# Altium PCB bms_afe-1_1.PcbDoc (part 1 of 2)
Units mm, origin at the board's own origin, x right, y up, seen from the top; angles counter-clockwise.
Board outline 368 x 57.35 mm, 4 copper layers (L1, L2, L3, L4), stack 1.586 mm thick; 218 components, 120 nets, 515 pads, 192 vias.
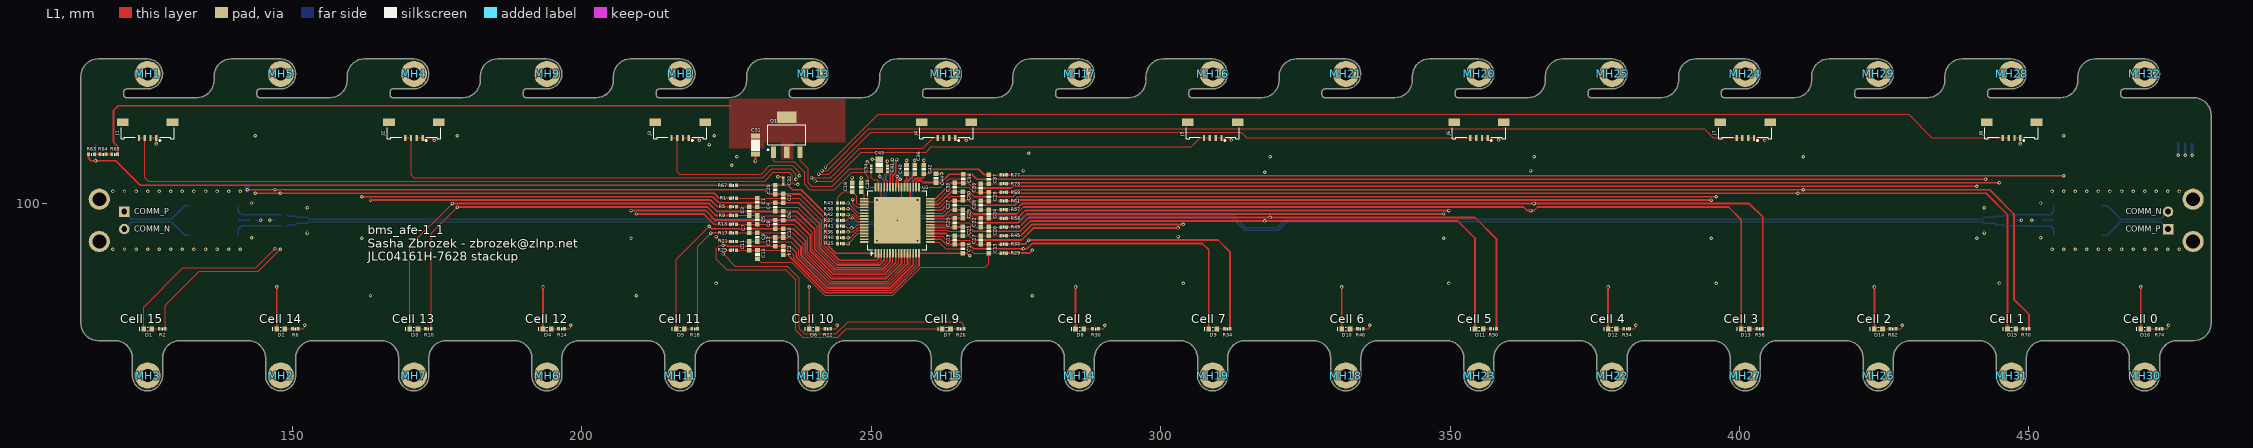
[diagram p0: L1 view]
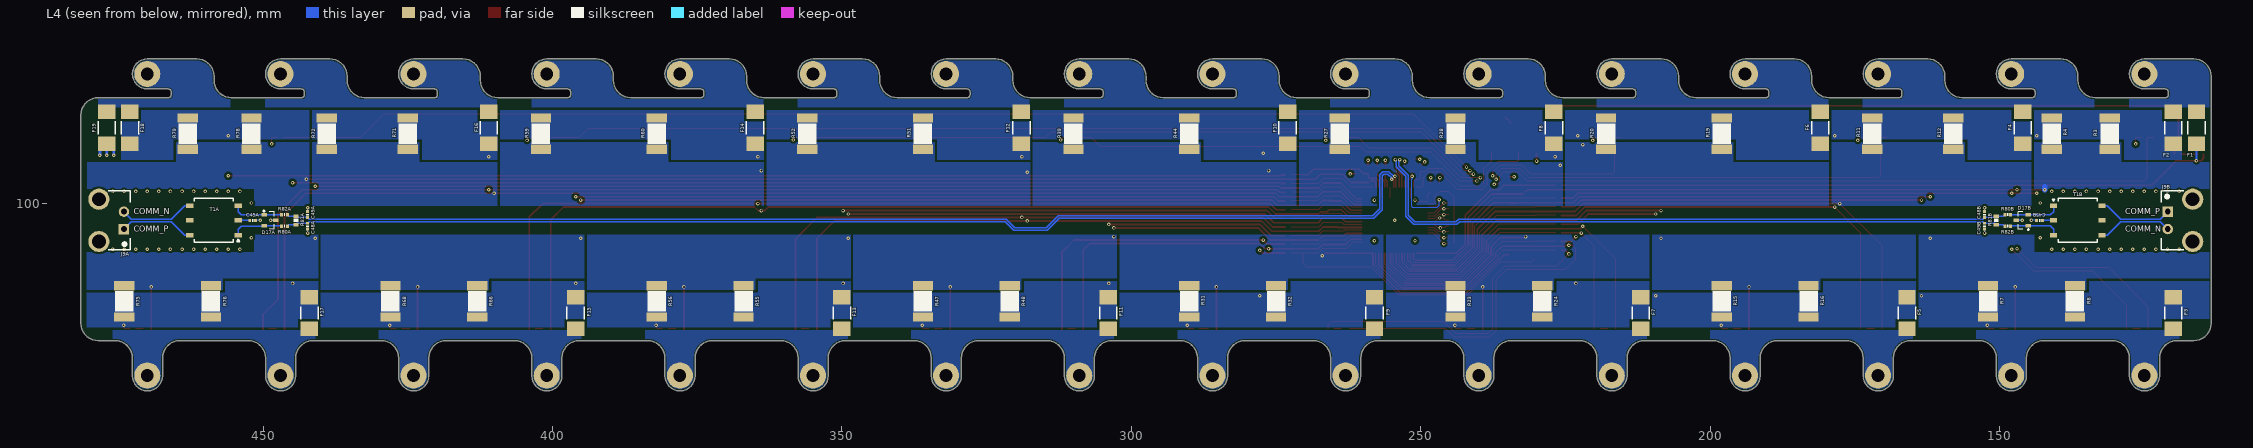
[diagram p1: L4 view, seen from below]
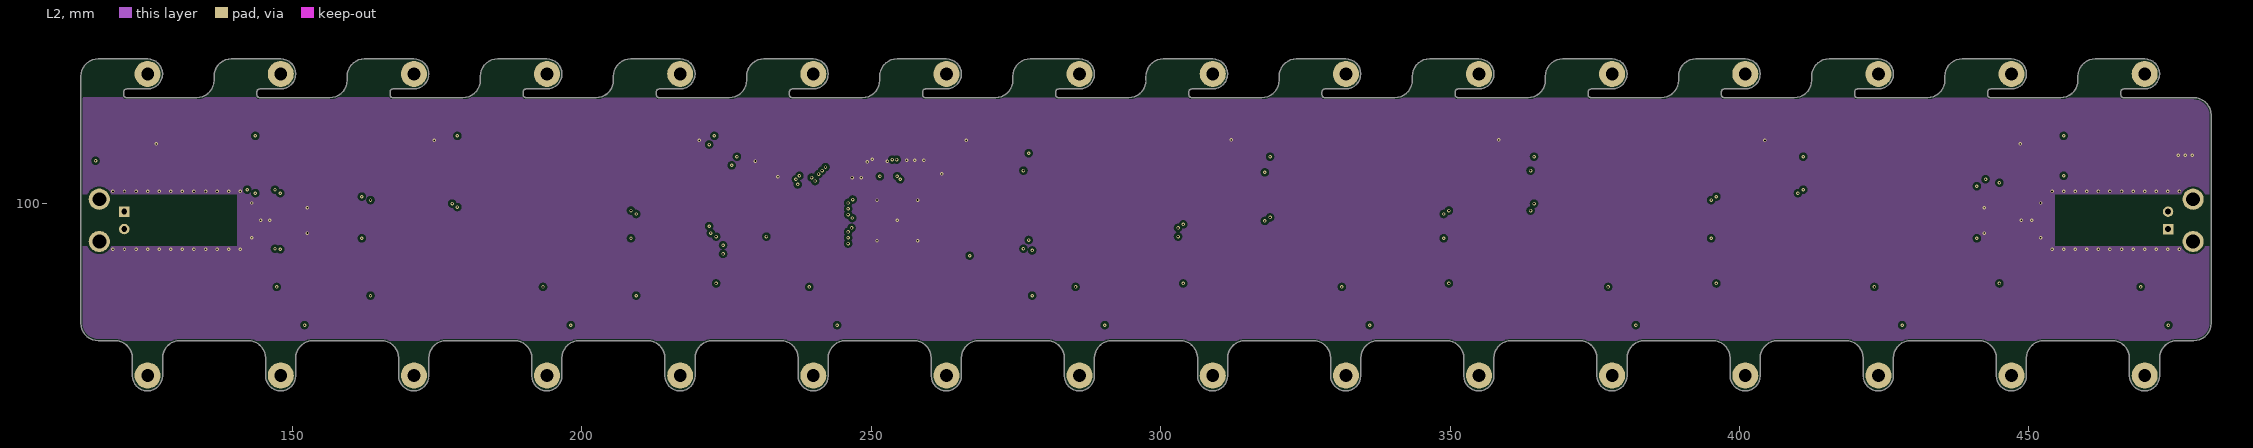
[diagram p2: L2]
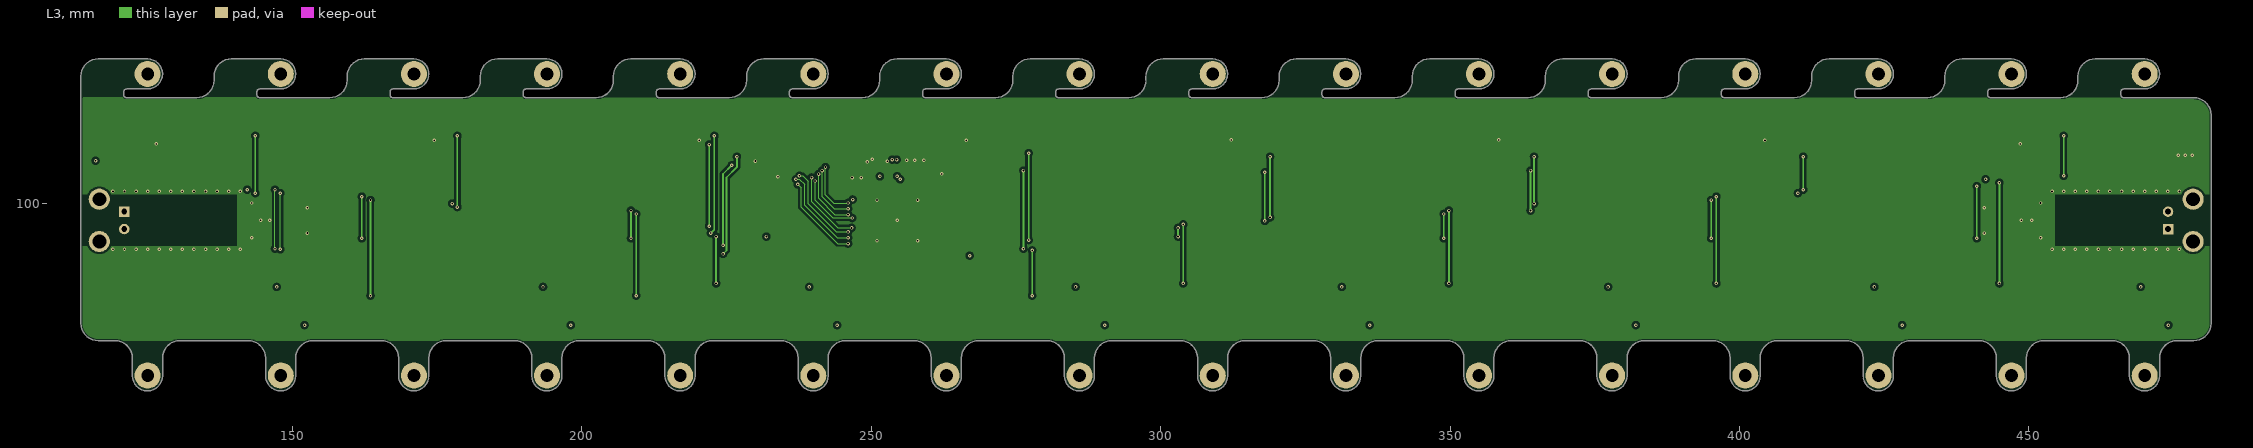
[diagram p3: L3]

## Layer stack, top to bottom
Top Solder: solder mask 0.0102, Solder Resist, Dk 3.5
L1: signal copper 0.035
D1: prepreg 0.2104, PP-006, Dk 4.1
L2: signal copper 0.0152
D2: dielectric 1.065, FR-4, Dk 4.8
L3: signal copper 0.0152
D3: prepreg 0.2104, PP-006, Dk 4.1
L4: signal copper 0.035
Bottom Solder: solder mask 0.0102, Solder Resist, Dk 3.5

## Board outline
1493 vertices, not listed, extent 113.469,67.545 481.469,124.895

## Design rules (kind name [scope] priority, off if disabled: settings)
AcuteAngle [All] p1: minimum=8.00000000000000E+0001 checktracksonly=FALSE
BoardOutlineClearance [All] p1: gap=0.3 ignorepadtopadclearanceinfootprint=FALSE except(0: Arc-SplitContinuation Track-SplitContinuation SMDPad-SplitContinuation THPad-SplitContinuation Via-SplitContinuation Fill-SplitContinuation Poly-SplitContinuation Region-SplitContinuation Text-SplitContinuation)
Clearance [All] p1: gap=0.15 ignorepadtopadclearanceinfootprint=FALSE except(0.4: Arc-Fill Arc-Poly Arc-Region Track-Fill Track-Poly Track-Region SMDPad-Fill SMDPad-Poly SMDPad-Region THPad-Fill THPad-Poly THPad-Region Via-Fill Via-Poly Via-Region Fill-Fill Fill-Poly Fill-Region Poly-Poly Poly-Region Region-Region)
DiffPairsRouting DE_100 [InDifferentialPairClass('DE_100')] p1: maxlimit=0.2 minlimit=0.2 mostfreqgap=0.2 toplayer_minwidth=0.218 toplayer_maxwidth=0.218 toplayer_prefwidth=0.218 midlayer1_minwidth=0.218 midlayer1_maxwidth=0.218 midlayer1_prefwidth=0.218 midlayer2_minwidth=0.218 midlayer2_maxwidth=0.218 midlayer2_prefwidth=0.218 bottomlayer_minwidth=0.218 bottomlayer_maxwidth=0.218 bottomlayer_prefwidth=0.218 maxuncoupledlength=12.7
HoleSize [All] p1: absolutevalues=TRUE maxlimit=64 minlimit=0.3 maxpercent=80.000 minpercent=20.000
MinimumAnnularRing [All] p1: minimumring=0.125
MinimumSolderMaskSliver [All] p1: minsoldermaskwidth=0.05
PlaneClearance [All] p1: clearance=0.4
PlaneConnect [All] p1: pad.planeconnectstyle=Relief pad.reliefexpansion=0.508 pad.reliefentries=4 pad.reliefconductorwidth=0.254 pad.reliefairgap=0.254 via.planeconnectstyle=Direct via.reliefexpansion=0.508 via.reliefentries=4 via.reliefconductorwidth=0.254 via.reliefairgap=0.254
PolygonConnect PolygonConnect_MH [HasFootprint('HOLE_M2')] p1: connectstyle=Direct reliefconductorwidth=0.254 reliefentries=4 polygonreliefangle="90 Angle" airgapwidth=0.254
PolygonConnect [All] p2: thpad.connectstyle=Relief thpad.reliefconductorwidth=0.254 thpad.reliefentries=4 thpad.polygonreliefangle="90 Angle" thpad.airgapwidth=0.254 smdpad.connectstyle=Direct smdpad.reliefconductorwidth=0.254 smdpad.reliefentries=4 smdpad.polygonreliefangle="90 Angle" smdpad.airgapwidth=0.254 via.connectstyle=Direct via.reliefconductorwidth=0.254 via.reliefentries=4 via.polygonreliefangle="90 Angle" via.airgapwidth=0.254
RoutingVias [All] p1: holewidth=0.3 width=0.6 viastyle="Through Hole" minholewidth=0.3 minwidth=0.6 maxholewidth=25 maxwidth=25 viatemplateguid#1={3B8295E5-CAAF-4C18-935D-10A9A8B2B12F} viatemplateguid#2={ACBB2F03-A6D7-4ED9-AAE5-3FD5D15C8CEC} viatemplatename#1=v50h35 viatemplatename#2=v65h30
SilkToSilkClearance [All] p1: silktosilkclearance=0.05
SilkToSolderMaskClearance [IsPad] p1: minsilkscreentomaskgap=0.005 clearancetoexposedcopper=FALSE
SolderMaskExpansion Vias [IsVia] p1: expansion=0.1 istentingtop=FALSE soldermaskfromhole=TRUE
SolderMaskExpansion [All] p2: expansion=0.102 istentingtop=FALSE
SupplyNets "Schematic Supply Nets_1" [InNet('GND')] p1: voltage=0.000
Width [All] p1: maxlimit=50 minlimit=0.15 preferedwidth=0.2
23 further rules are at their usual default settings.

## Classes and differential pairs
differential pair class DE_100: COMH. COML. COMMA COMMB
channel class comm_connector: conn_down conn_up
component class conn_up: C45B C48B C49B D17B J9B R80B R81B R82B T1B
component class conn_down: C45A C48A C49A D17A J9A R80A R81A R82A T1A
component class top: C1 C2 C3 C4 C5 C6 C7 C8 C9 C10 C11 C12 C13 C14 C15 C16 C17 C18 C19 C20 C21 C22 C23 C24 C25 C26 C27 C28 C29 C30 C31 C32 C33 C34 C35 C36 C37 C38 C39 C40 C41 C42 C43 C44 D1 D2 D3 D4 D5 D6 D7 D8 D9 D10 D11 D12 D13 D14 D15 D16 F1 F2 F3 F4 F5 F6 F7 F8 F9 F10 F11 F12 F13 F14 F15 F16 F17 F18 F19 J1 J2 J3 J4 J5 J6 J7 J8 MH1 MH2 MH3 MH4 MH5 MH6 MH7 MH8 MH9 MH10 MH11 MH12 MH13 MH14 MH15 MH16 MH17 MH18 MH19 MH20 MH21 MH22 MH23 MH24 MH25 MH26 MH27 MH28 MH29 MH30 MH31 MH32 Q1 R1 R2 R3 R4 R5 R6 R7 R8 R9 R10 R11 R12 R13 R14 R15 R16 R17 R18 R19 R20 R21 R22 R23 R24 R25 R26 R27 R28 R29 R30 R31 R32 R33 R34 R35 R36 R37 R38 R39 R40 R41 R42 R43 R44 R45 R46 R47 R48 R49 R50 R51 R52 R53 R54 R55 R56 R57 R58 R59 R60 R61 R62 R63 R64 R65 R66 R67 R68 R69 R70 R71 R72 R73 R74 R75 R76 R77 R78 R79 U1
differential pair COMMB: +COMMB_P -COMMB_N
differential pair COMMA: +COMMA_P -COMMA_N
differential pair COML.: +COML._P -COML._N
differential pair COMH.: +COMH._P -COMH._N

## Components (designator, comment, footprint, x,y, rotation, side; value= is the part's Value field where it differs from the comment)
C1 "CL10B474KA8NNNC" C0603 230.3,100.1 r270 top
C2 "CL10B474KA8NNNC" C0603 234.8,100.8 r270 top
C3 "CL10B474KA8NNNC" C0603 228.9,98.6 r270 top
C4 "CL10B474KA8NNNC" C0603 233.4,99.3 r270 top
C5 "CL10B474KA8NNNC" C0603 230.3,97.1 r270 top
C6 "CL10B474KA8NNNC" C0603 234.8,97.8 r270 top
C7 "CL10B474KA8NNNC" C0603 228.9,95.6 r270 top
C8 "CL10B474KA8NNNC" C0603 233.4,96.3 r270 top
C9 "CL10B474KA8NNNC" C0603 230.3,94.1 r270 top
C10 "CL10B474KA8NNNC" C0603 234.8,94.8 r270 top
C11 "CL10B474KA8NNNC" C0603 228.9,92.6 r270 top
C12 "CL10B474KA8NNNC" C0603 233.4,93.3 r270 top
C13 "CL10B474KA8NNNC" C0603 230.35,91.1 r270 top
C14 "CL10B474KA8NNNC" C0603 234.8,91.8 r270 top
C15 "CL10B474KA8NNNC" C0603 270.3,92.1 r90 top
C16 "CL10B474KA8NNNC" C0603 265.8,92.1 r90 top
C17 "CL10B474KA8NNNC" C0603 268.9,93.6 r90 top
C18 "CL10B105KA8NNNC" C0603 246.7,102.7 r90 top
C19 "CL10B474KA8NNNC" C0603 264.4,93.6 r90 top
C20 "CL10B474KA8NNNC" C0603 270.3,95.1 r90 top
C21 "CL10B474KA8NNNC" C0603 265.8,95.1 r90 top
C22 "CL10B474KA8NNNC" C0603 268.9,96.6 r90 top
C23 "CL10B474KA8NNNC" C0603 264.4,96.6 r90 top
C24 "CL10B474KA8NNNC" C0603 270.3,98.1 r90 top
C25 "CL10B474KA8NNNC" C0603 265.8,98.1 r90 top
C26 "CL10B474KA8NNNC" C0603 268.9,99.6 r90 top
C27 "CL10B474KA8NNNC" C0603 264.4,99.6 r90 top
C28 "CL10B474KA8NNNC" C0603 270.3,101.1 r90 top
C29 "CL10B474KA8NNNC" C0603 233.4,102.3 r90 top
C30 "CL10B474KA8NNNC" C0603 265.8,101.2 r90 top
C31 "TCC1206X7R224K101FT" C1206 230,110 r270 top
C32 "CC0402KRX7R0BB103" C0402 234.8,103.8 r90 top
C33 "CL10B474KA8NNNC" C0603 268.9,102.6 r90 top
C34 "CL05B104KB54PNC" C0402 250,105.9 r90 top
C35 "CL10B474KA8NNNC" C0603 264.4,102.7 r90 top
C36 "CL10B105KA8NNNC" C0603 257.5,105.8 r90 top
C37 "CL10B474KA8NNNC" C0603 270.3,104.1 r90 top
C38 "CL10B474KA8NNNC" C0603 265.9,104.2 r90 top
C39 "CL10B105KA8NNNC" C0603 248.3,102.7 r90 top
C40 "CL10B105KA8NNNC" C0603 256.1,105.8 r90 top
C41 "CL05B104KB54PNC" C0402 252.8,105.9 r90 top
C42 "CL10B474KA8NNNC" C0603 259.1,105.8 r90 top
C43 "CL21B475KOFNNNE" C0805 251.4,106.6 r90 top
C44 "CL10B474KA8NNNC" C0603 261.2,104.3 r90 top
C45A "CL05B104KB54PNC" C0402 451.8,97 r180 bottom (schematic designator C45)
C45B "CL05B104KB54PNC" C0402 143.1,97 r0 bottom (schematic designator C45)
C48A "0402YA101JAT2A" C0402 442.3,96 r270 bottom (schematic designator C48)
C48B "0402YA101JAT2A" C0402 152.6,98 r90 bottom (schematic designator C48)
C49A "0402YA101JAT2A" C0402 442.3,98 r90 bottom (schematic designator C49)
C49B "0402YA101JAT2A" C0402 152.6,96 r270 bottom (schematic designator C49)
D1 "LTST-C190KRKT" LED_0603P_RED 125,78.25 r0 top
D2 "LTST-C190KRKT" LED_0603P_RED 148,78.25 r0 top
D3 "LTST-C190KRKT" LED_0603P_RED 171,78.25 r0 top
D4 "LTST-C190KRKT" LED_0603P_RED 194,78.25 r0 top
D5 "LTST-C190KRKT" LED_0603P_RED 217,78.25 r0 top
D6 "LTST-C190KRKT" LED_0603P_RED 240,78.25 r0 top
D7 "LTST-C190KRKT" LED_0603P_RED 263,78.25 r0 top
D8 "LTST-C190KRKT" LED_0603P_RED 286,78.25 r0 top
D9 "LTST-C190KRKT" LED_0603P_RED 309,78.25 r0 top
D10 "LTST-C190KRKT" LED_0603P_RED 332,78.25 r0 top
D11 "LTST-C190KRKT" LED_0603P_RED 355,78.25 r0 top
D12 "LTST-C190KRKT" LED_0603P_RED 378,78.25 r0 top
D13 "LTST-C190KRKT" LED_0603P_RED 401,78.25 r0 top
D14 "LTST-C190KRKT" LED_0603P_RED 424,78.25 r0 top
D15 "LTST-C190KRKT" LED_0603P_RED 447,78.25 r0 top
D16 "LTST-C190KRKT" LED_0603P_RED 470,78.25 r0 top
D17A "PESD2USB3UX" 3SOT23 448.8,97 r180 bottom (schematic designator D17)
D17B "PESD2USB3UX" 3SOT23 146.1,97 r0 bottom (schematic designator D17)
F1 "JFC2410-0500TS" JDTFUSE_JFC2410 116,113 r270 bottom
F2 "JFC2410-0500TS" JDTFUSE_JFC2410 120,113 r270 bottom
F3 "JFC2410-0500TS" JDTFUSE_JFC2410 120,81 r90 bottom
F4 "JFC2410-0500TS" JDTFUSE_JFC2410 146,113 r270 bottom
F5 "JFC2410-0500TS" JDTFUSE_JFC2410 166,81 r90 bottom
F6 "JFC2410-0500TS" JDTFUSE_JFC2410 181,113 r270 bottom
F7 "JFC2410-0500TS" JDTFUSE_JFC2410 212,81 r90 bottom
F8 "JFC2410-0500TS" JDTFUSE_JFC2410 227,113 r270 bottom
F9 "JFC2410-0500TS" JDTFUSE_JFC2410 258,81 r90 bottom
F10 "JFC2410-0500TS" JDTFUSE_JFC2410 273,113 r270 bottom
F11 "JFC2410-0500TS" JDTFUSE_JFC2410 304,81 r90 bottom
F12 "JFC2410-0500TS" JDTFUSE_JFC2410 319,113 r270 bottom
F13 "JFC2410-0500TS" JDTFUSE_JFC2410 350,81 r90 bottom
F14 "JFC2410-0500TS" JDTFUSE_JFC2410 365,113 r270 bottom
F15 "JFC2410-0500TS" JDTFUSE_JFC2410 396,81 r90 bottom
F16 "JFC2410-0500TS" JDTFUSE_JFC2410 411,113 r270 bottom
F17 "JFC2410-0500TS" JDTFUSE_JFC2410 442,81 r90 bottom
F18 "JFC2410-0500TS" JDTFUSE_JFC2410 473,113 r270 bottom
F19 "JFC2410-0500TS" JDTFUSE_JFC2410 477,113 r270 bottom
J1 "2005280040" MOLEX_FD19_1.00mm_2005280040 125,114.6 r180 top
J2 "2005280040" MOLEX_FD19_1.00mm_2005280040 171,114.6 r180 top
J3 "2005280040" MOLEX_FD19_1.00mm_2005280040 217,114.6 r180 top
J4 "2005280040" MOLEX_FD19_1.00mm_2005280040 263,114.6 r180 top
J5 "2005280040" MOLEX_FD19_1.00mm_2005280040 309,114.6 r180 top
J6 "2005280040" MOLEX_FD19_1.00mm_2005280040 355,114.6 r180 top
J7 "2005280040" MOLEX_FD19_1.00mm_2005280040 401,114.6 r180 top
J8 "2005280040" MOLEX_FD19_1.00mm_2005280040 447,114.6 r180 top
J9A "43650-0204" MOLEX_MICROFIT_0436500204 478,97 r270 bottom locked (schematic designator J9)
J9B "43650-0204" MOLEX_MICROFIT_0436500204 117,97 r90 bottom locked (schematic designator J9)
MH1 "HOLE_M2" HOLE_M2 125,122.3 r0 top
MH2 "HOLE_M2" HOLE_M2 148,70.2 r0 top
MH3 "HOLE_M2" HOLE_M2 125,70.2 r0 top
MH4 "HOLE_M2" HOLE_M2 171,122.3 r0 top
MH5 "HOLE_M2" HOLE_M2 148,122.3 r0 top
MH6 "HOLE_M2" HOLE_M2 194,70.2 r0 top
MH7 "HOLE_M2" HOLE_M2 171,70.2 r0 top
MH8 "HOLE_M2" HOLE_M2 217,122.3 r0 top
MH9 "HOLE_M2" HOLE_M2 194,122.3 r0 top
MH10 "HOLE_M2" HOLE_M2 240,70.2 r0 top
MH11 "HOLE_M2" HOLE_M2 217,70.2 r0 top
MH12 "HOLE_M2" HOLE_M2 263,122.3 r0 top
MH13 "HOLE_M2" HOLE_M2 240,122.3 r0 top
MH14 "HOLE_M2" HOLE_M2 286,70.2 r0 top
MH15 "HOLE_M2" HOLE_M2 263,70.2 r0 top
MH16 "HOLE_M2" HOLE_M2 309,122.3 r0 top
MH17 "HOLE_M2" HOLE_M2 286,122.3 r0 top
MH18 "HOLE_M2" HOLE_M2 332,70.2 r0 top
MH19 "HOLE_M2" HOLE_M2 309,70.2 r0 top
MH20 "HOLE_M2" HOLE_M2 355,122.3 r0 top
MH21 "HOLE_M2" HOLE_M2 332,122.3 r0 top
MH22 "HOLE_M2" HOLE_M2 378,70.2 r0 top
MH23 "HOLE_M2" HOLE_M2 355,70.2 r0 top
MH24 "HOLE_M2" HOLE_M2 401,122.3 r0 top
MH25 "HOLE_M2" HOLE_M2 378,122.3 r0 top
MH26 "HOLE_M2" HOLE_M2 424,70.2 r0 top
MH27 "HOLE_M2" HOLE_M2 401,70.2 r0 top
MH28 "HOLE_M2" HOLE_M2 447,122.3 r0 top
MH29 "HOLE_M2" HOLE_M2 424,122.3 r0 top
MH30 "HOLE_M2" HOLE_M2 470,70.2 r0 top
MH31 "HOLE_M2" HOLE_M2 447,70.2 r0 top
MH32 "HOLE_M2" HOLE_M2 470,122.3 r0 top
Q1 "NSV1C201MZ4T1G" 4SOT223 235.4,111.8 r0 top
R1 "RC0402FR-07100RL" R0402 226.2,100.85 r0 top value=100
R2 "0402WGF1001TCE" R0402 127.5,78.25 r180 top value=1k
R3 "RC2512FK-0730RL" R2512 131,112 r90 bottom value=30
R4 "RC2512FK-0730RL" R2512 141,112 r270 bottom value=30
R5 "RC0402FR-07100RL" R0402 226.2,99.35 r0 top value=100
R6 "0402WGF1001TCE" R0402 150.5,78.25 r180 top value=1k
R7 "RC2512FK-0730RL" R2512 152,83 r270 bottom value=30
R8 "RC2512FK-0730RL" R2512 137,83 r90 bottom value=30
R9 "RC0402FR-07100RL" R0402 226.2,97.85 r0 top value=100
R10 "0402WGF1001TCE" R0402 173.5,78.25 r180 top value=1k
R11 "RC2512FK-0730RL" R2512 172,112 r90 bottom value=30
R12 "RC2512FK-0730RL" R2512 158,112 r270 bottom value=30
R13 "RC0402FR-07100RL" R0402 226.2,96.35 r0 top value=100
R14 "0402WGF1001TCE" R0402 196.5,78.25 r180 top value=1k
R15 "RC2512FK-0730RL" R2512 198,83 r270 bottom value=30
R16 "RC2512FK-0730RL" R2512 183,83 r90 bottom value=30
R17 "RC0402FR-07100RL" R0402 226.2,94.85 r0 top value=100
R18 "0402WGF1001TCE" R0402 219.5,78.25 r180 top value=1k
R19 "RC2512FK-0730RL" R2512 198,112 r90 bottom value=30
R20 "RC2512FK-0730RL" R2512 218,112 r270 bottom value=30
R21 "RC0402FR-07100RL" R0402 226.2,93.35 r0 top value=100
R22 "0402WGF1001TCE" R0402 242.5,78.25 r180 top value=1k
R23 "RC2512FK-0730RL" R2512 244,83 r270 bottom value=30
R24 "RC2512FK-0730RL" R2512 229,83 r90 bottom value=30
R25 "RC0402FR-07100RL" R0402 226.2,91.85 r0 top value=100
R26 "0402WGF1001TCE" R0402 265.5,78.25 r180 top value=1k
R27 "RC2512FK-0730RL" R2512 264,112 r90 bottom value=30
R28 "RC2512FK-0730RL" R2512 244,112 r270 bottom value=30
R29 "RC0402FR-07100RL" R0402 272.9,91.35 r180 top value=100
R30 "0402WGF1001TCE" R0402 288.75,78.25 r180 top value=1k
R31 "RC2512FK-0730RL" R2512 290,83 r270 bottom value=30
R32 "RC2512FK-0730RL" R2512 275,83 r90 bottom value=30
R33 "RC0402FR-07100RL" R0402 272.9,92.9 r180 top value=100
R34 "0402WGF1001TCE" R0402 311.5,78.25 r180 top value=1k
R35 "0402WGF1002TCE" R0402 244.7,93 r0 top value=10k
R36 "0402WGF1002TCE" R0402 244.7,95 r0 top value=10k
R37 "0402WGF1002TCE" R0402 244.7,97 r0 top value=10k
R38 "0402WGF1002TCE" R0402 244.7,99 r0 top value=10k
R39 "RC2512FK-0730RL" R2512 310,112 r90 bottom value=30
R40 "0402WGF1002TCE" R0402 244.7,94 r0 top value=10k
R41 "0402WGF1002TCE" R0402 244.7,96 r0 top value=10k
R42 "0402WGF1002TCE" R0402 244.7,98 r0 top value=10k
R43 "0402WGF1002TCE" R0402 244.7,100 r0 top value=10k
R44 "RC2512FK-0730RL" R2512 290,112 r270 bottom value=30
R45 "RC0402FR-07100RL" R0402 272.9,94.35 r180 top value=100
R46 "0402WGF1001TCE" R0402 334.5,78.25 r180 top value=1k
R47 "RC2512FK-0730RL" R2512 336,83 r270 bottom value=30
R48 "RC2512FK-0730RL" R2512 321,83 r90 bottom value=30
R49 "RC0402FR-07100RL" R0402 272.9,95.85 r180 top value=100
R50 "0402WGF1001TCE" R0402 357.5,78.25 r180 top value=1k
R51 "RC2512FK-0730RL" R2512 336,112 r90 bottom value=30
R52 "RC2512FK-0730RL" R2512 356,112 r270 bottom value=30
R53 "RC0402FR-07100RL" R0402 272.9,97.35 r180 top value=100
R54 "0402WGF1001TCE" R0402 380.5,78.25 r180 top value=1k
R55 "RC2512FK-0730RL" R2512 367,83 r270 bottom value=30
R56 "RC2512FK-0730RL" R2512 382,83 r90 bottom value=30
R57 "RC0402FR-07100RL" R0402 272.9,98.85 r180 top value=100
R58 "0402WGF1001TCE" R0402 403.5,78.25 r180 top value=1k
R59 "RC2512FK-0730RL" R2512 402,112 r90 bottom value=30
R60 "RC2512FK-0730RL" R2512 382,112 r270 bottom value=30
R61 "RC0402FR-07100RL" R0402 272.9,100.35 r180 top value=100
R62 "0402WGF1001TCE" R0402 426.5,78.25 r180 top value=1k
R63 "RC0402FR-07100RL" R0402 115.3,108.4 r180 top value=100
R64 "RC0402FR-07100RL" R0402 117.3,108.4 r180 top value=100
R65 "RC0402FR-07100RL" R0402 119.3,108.4 r180 top value=100
R66 "RC2512FK-0730RL" R2512 413,83 r270 bottom value=30
R67 "RC0402FR-0730RL" R0402 226.2,103.05 r0 top value=30
R68 "RC2512FK-0730RL" R2512 428,83 r90 bottom value=30
R69 "RC0402FR-07100RL" R0402 272.9,101.85 r180 top value=100
R70 "0402WGF1001TCE" R0402 449.5,78.25 r180 top value=1k
R71 "RC2512FK-0730RL" R2512 425,112 r90 bottom value=30
R72 "RC2512FK-0730RL" R2512 439,112 r270 bottom value=30
R73 "RC0402FR-07100RL" R0402 272.9,103.35 r180 top value=100
R74 "0402WGF1001TCE" R0402 472.5,78.25 r180 top value=1k
R75 "RC2512FK-0730RL" R2512 474,83 r270 bottom value=30
R76 "RC2512FK-0730RL" R2512 459,83 r90 bottom value=30
R77 "RC0402FR-07100RL" R0402 272.9,104.85 r180 top value=100
R78 "RC2512FK-0730RL" R2512 452,112 r90 bottom value=30
R79 "RC2512FK-0730RL" R2512 463,112 r270 bottom value=30
R80A "0402WGF499JTCE" R0402 446.3,96 r0 bottom value=49.9 (schematic designator R80)
R80B "0402WGF499JTCE" R0402 148.6,98 r180 bottom value=49.9 (schematic designator R80)
R81A "HP03W5F1001T5E" R0603 444.3,97 r270 bottom value=1k (schematic designator R81)
R81B "HP03W5F1001T5E" R0603 150.6,97 r90 bottom value=1k (schematic designator R81)
R82A "0402WGF499JTCE" R0402 446.3,98 r0 bottom value=49.9 (schematic designator R82)
R82B "0402WGF499JTCE" R0402 148.6,96 r180 bottom value=49.9 (schematic designator R82)
T1A "SM91502ALA-E" BOURNS_SM91502 458.5,97 r0 bottom (schematic designator T1)
T1B "SM91502ALA-E" BOURNS_SM91502 136.5,97 r180 bottom (schematic designator T1)
U1 "BQ79616PAPRQ1" TI_PAP0064F 254.5,97 r90 top

## Footprints (in the part's own frame and the unit in brackets; to place one, negate y for a bottom-side part, rotate by r counter-clockwise, add the part's x,y. Pads: shape width x height; smd on the part's side, far side on the other; paste and mask are expansions set on the pad)
3SOT23 [mm] "SOT23, 3-Leads, Body 3.0x2.6mm (max), Pitch 1.01mm, IPC High Density"
  rect 0.95x0.6 smd: 1(-1.025,0.95) 2(-1.025,-0.95) 3(1.025,0)
  silkscreen extent -1.18,-1.5 0.7,1.73, body extent -1.25,-1.5 1.25,1.5, height 1.01
4SOT223 [mm] "SOT223, 4-Leads, Body 6.6x7.1mm (max), Pitch 2.30mm, IPC Medium Density"
  rect 0.9x2 smd: 1(-2.3,-3) 2(0,-3) 3(2.3,-3)
  rect 3.3x2 smd: 4(0,3)
  silkscreen extent -3.32,-2.72 3.3,1.7, body extent -3.25,-3.5 3.25,3.5, height 1.76
BOURNS_SM91502 [mil]
  rect 50x30 smd mask+4: 1(-165,100) 2(-165,0) 3(-165,-100) 4(165,-100) 5(165,0) 6(165,100)
  silkscreen extent -175,-150 132,150, body extent -132,-150 132,150, height 225
C0402 [mm]
  rect 0.5x0.5 smd: 1(-0.5,0) 2(0.5,0)
  silkscreen extent -0.13,-0.25 0.13,0.25, body extent -0.5,-0.25 0.5,0.25, height 0.6
C0603 [mm]
  rect 0.8x0.8 smd: 1(-0.75,0) 2(0.75,0)
  silkscreen extent -0.23,-0.4 0.23,0.4, body extent -0.8,-0.4 0.8,0.4, height 1
C0805 [mm]
  rect 0.9x1.3 smd: 1(-0.95,0) 2(0.95,0)
  silkscreen extent -0.38,-0.63 0.37,0.63, body extent -1,-0.63 1,0.63, height 1.45
C1206 [mm]
  rect 0.9x1.6 smd: 1(-1.55,0) 2(1.55,0)
  silkscreen extent -0.97,-0.8 0.97,0.8, body extent -1.6,-0.8 1.6,0.8, height 1.9
HOLE_M2 [mm]
  round 4.5 hole 2.2 mask+0.102: 1(0,0)
JDTFUSE_JFC2410 [mm] "JFC2410-0500TS 6.1 x 2.5 mm Fuse smd 2410"
  rect 2.5x3 smd: 1(-2.75,0) 2(2.75,0)
  silkscreen extent -1.1,-1.5 1.1,1.5, body extent -3.05,-1.25 3.05,1.25, height 2.5
LED_0603P_RED [mm]
  rect 0.8x0.85 smd: 1(0.7,0) 2(-0.7,0)
  silkscreen extent -1.4,-0.33 0.1,0.33, body extent -0.81,-0.4 0.81,0.4, height 0.6
MOLEX_FD19_1.00mm_2005280040 [mm]
  rect 0.4x1 smd: 1(-1.5,3.35) 2(-0.5,3.35) 3(0.5,3.35) 4(1.5,3.35)
  rect 2x1.3 smd: EP0(-4.3,0.65) EP1(4.3,0.65)
  silkscreen extent -4.6,1.6 4.6,3.92, body extent -5,-1.75 5,3.55, height 1.91
MOLEX_MICROFIT_0436500204 [mm]
  rect 1.8x1.8 hole 1.02 paste-2539.97 mask+0: 1(1.5,3.965)
  round 1.8 hole 1.02 paste-2539.97 mask+0: 2(-1.5,3.965)
  round 3.66 hole 2.41 paste-2539.97 mask+0: 3(3.65,-0.355) 4(-3.65,-0.355)
  silkscreen extent -5.1,1.22 5.1,5.08, body extent -4.82,-4.95 4.83,4.95, height 6.07
R0402 [mm]
  rect 0.5x0.6 smd: 1(-0.5,0) 2(0.5,0)
  silkscreen extent -0.13,-0.25 0.13,0.25, body extent -0.5,-0.25 0.5,0.25, height 0.5
R0603 [mm]
  rect 0.6x0.9 smd: 1(-0.75,0) 2(0.75,0)
  silkscreen extent -0.33,-0.4 0.33,0.4, body extent -0.77,-0.4 0.77,0.4, height 0.75
R2512 [mm]
  rect 1.6x3.5 smd: 1(-2.7,0) 2(2.7,0)
  silkscreen extent -1.78,-1.6 1.77,1.6, body extent -3.17,-1.6 3.17,1.6, height 1.6
TI_PAP0064F [mm]
  rect 1.5x0.3 smd: 1(-5.7,3.75) 2(-5.7,3.25) 3(-5.7,2.75) 4(-5.7,2.25) 5(-5.7,1.75) 6(-5.7,1.25) 7(-5.7,0.75) 8(-5.7,0.25) 9(-5.7,-0.25) 10(-5.7,-0.75) 11(-5.7,-1.25) 12(-5.7,-1.75) 13(-5.7,-2.25) 14(-5.7,-2.75) 15(-5.7,-3.25) 16(-5.7,-3.75) 33(5.7,-3.75) 34(5.7,-3.25) 35(5.7,-2.75) 36(5.7,-2.25) 37(5.7,-1.75) 38(5.7,-1.25) 39(5.7,-0.75) 40(5.7,-0.25) 41(5.7,0.25) 42(5.7,0.75) 43(5.7,1.25) 44(5.7,1.75) 45(5.7,2.25) 46(5.7,2.75) 47(5.7,3.25) 48(5.7,3.75)
  rect 0.3x1.5 smd: 17(-3.75,-5.7) 18(-3.25,-5.7) 19(-2.75,-5.7) 20(-2.25,-5.7) 21(-1.75,-5.7) 22(-1.25,-5.7) 23(-0.75,-5.7) 24(-0.25,-5.7) 25(0.25,-5.7) 26(0.75,-5.7) 27(1.25,-5.7) 28(1.75,-5.7) 29(2.25,-5.7) 30(2.75,-5.7) 31(3.25,-5.7) 32(3.75,-5.7) 49(3.75,5.7) 50(3.25,5.7) 51(2.75,5.7) 52(2.25,5.7) 53(1.75,5.7) 54(1.25,5.7) 55(0.75,5.7) 56(0.25,5.7) 57(-0.25,5.7) 58(-0.75,5.7) 59(-1.25,5.7) 60(-1.75,5.7) 61(-2.25,5.7) 62(-2.75,5.7) 63(-3.25,5.7) 64(-3.75,5.7)
  rect 8x8 smd mask-2539.97: EP0(0,0)
  silkscreen extent -6,-5.1 5.1,5.1, body extent -6.02,-6.02 6.02,6.02, height 1.1

## Part data
C1 C2 C3 C4 C5 C6 C7 C8 C9 C10 C11 C12 C13 C14 C15 C16 C17 C19 C20 C21 C22 C23 C24 C25 C26 C27 C28 C29 C30 C33 C35 C37 C38 C42 C44: Capacitance="470 nF", Dielectric=X7R, Manufacturer="Samsung Electro-Mechanics", Package=0603, Voltage Rating="25 V", ComponentLink1Description=Datasheet, ComponentLink1URL=https://wmsc.lcsc.com/wmsc/upload/file/pdf/v2/lcsc/2304140030_Samsung-Electro-Mechanics-CL10B474KA8NNNC_C1623.pdf, Manufacturer Part Number=CL10B474KA8NNNC, Supplier 2=LCSC, Supplier Part Number 2=C1623
C18 C36 C39 C40: Capacitance="1 uF", Dielectric=X7R, Manufacturer="Samsung Electro-Mechanics", Package=0603, Voltage Rating="25 V", ComponentLink1Description=Datasheet, ComponentLink1URL=https://wmsc.lcsc.com/wmsc/upload/file/pdf/v2/lcsc/2304140030_Samsung-Electro-Mechanics-CL10B105KA8NNNC_C29936.pdf, Manufacturer Part Number=CL10B105KA8NNNC, Supplier 2=LCSC, Supplier Part Number 2=C29936
C31: Capacitance="220 nF", Dielectric=X7R, Manufacturer=CCTC, Package=1206, Voltage Rating="100 V", ComponentLink1Description=Datasheet, ComponentLink1URL=https://wmsc.lcsc.com/wmsc/upload/file/pdf/v2/lcsc/2304140030_CCTC-TCC1206X7R224K101FT_C374077.pdf, Manufacturer Part Number=TCC1206X7R224K101FT, Supplier 2=LCSC, Supplier Part Number 2=C374077
C32: Capacitance="10 nF", Dielectric=X7R, Manufacturer=YAGEO, Package=0402, Voltage Rating="100 V", ComponentLink1Description=Datasheet, ComponentLink1URL=https://wmsc.lcsc.com/wmsc/upload/file/pdf/v2/lcsc/2007171235_YAGEO-CC0402KRX7R0BB103_C527014.pdf, Manufacturer Part Number=CC0402KRX7R0BB103, Supplier 2=LCSC, Supplier Part Number 2=C527014
C34 C41 C45A C45B: Capacitance="100 nF", Dielectric=X7R, Manufacturer="Samsung Electro-Mechanics", Package=0402, Voltage Rating="50 V", ComponentLink1Description=Datasheet, ComponentLink1URL=https://wmsc.lcsc.com/wmsc/upload/file/pdf/v2/lcsc/2304140030_Samsung-Electro-Mechanics-CL05B104KB54PNC_C307331.pdf, Manufacturer Part Number=CL05B104KB54PNC, Supplier 2=LCSC, Supplier Part Number 2=C307331
C43: Capacitance="4.7 uF", Dielectric=X7R, Manufacturer="Samsung Electro-Mechanics", Package=0805, Voltage Rating="16 V", ComponentLink1Description=Datasheet, ComponentLink1URL=https://wmsc.lcsc.com/wmsc/upload/file/pdf/v2/lcsc/2304140030_Samsung-Electro-Mechanics-CL21B475KOFNNNE_C107365.pdf, Manufacturer Part Number=CL21B475KOFNNNE, Supplier 2=LCSC, Supplier Part Number 2=C107365
C48A C48B C49A C49B: Capacitance="100 pF", Dielectric=C0G, Manufacturer="Kyocera AVX", Package=0402, Voltage Rating="16 V", ComponentLink1Description=Datasheet, ComponentLink1URL=https://datasheet.lcsc.com/lcsc/2304140030_Kyocera-AVX-0402YA101JAT2A_C2174471.pdf, Manufacturer Part Number=0402YA101JAT2A, Supplier 2=LCSC, Supplier Part Number 2=C2174471
D1 D2 D3 D4 D5 D6 D7 D8 D9 D10 D11 D12 D13 D14 D15 D16: "LED SUPER RED CLEAR 0603 SMD", LED Color=Red, Manufacturer="Lite-On Inc", Supplier Part Number 1=160-1436-1-ND, ComponentLink1Description=Datasheet, ComponentLink1URL=https://optoelectronics.liteon.com/upload/download/DS-22-99-0151/LTST-C190KRKT.pdf, If="20 mA", Manufacturer Part Number=LTST-C190KRKT, Supplier 1=DigiKey, Supplier 2=LCSC, Supplier 3=Mouser, Supplier Part Number 2=C94869, Supplier Part Number 3=859-LTST-C190KRKT, Vf="2.0 V"
D17A D17B: "DIODE ESD USB SOT-23", Capacitance (pF)=0.7, Manufacturer="Nexperia USA Inc.", Min Breakdown Voltage="4.2 V", Supplier Part Number 1=1727-PESD2USB3UX-CT-ND, ComponentLink1Description=Datasheet, ComponentLink1URL=https://assets.nexperia.com/documents/data-sheet/PESD2USB3UX-T.pdf, Manufacturer Part Number=PESD2USB3UX, Polarity=Unidirectional, Standoff (V)=3.3, Supplier 1=DigiKey, Supplier 2=LCSC, Supplier 3=Mouser, Supplier Part Number 2=C3708426, Supplier Part Number 3=771-PESD2USB3UX-TR
F1 F2 F3 F4 F5 F6 F7 F8 F9 F10 F11 F12 F13 F14 F15 F16 F17 F18 F19: "FUSE 0.5A 250V SMD", Current="0.5 A", Manufacturer="Shenzhen JDTfuse", Supplier Part Number 1=C136377, ComponentLink1Description=Datasheet, ComponentLink1URL=https://www.lcsc.com/datasheet/C136377.pdf, Fuse Type="Slow-blow SMD", Manufacturer Part Number=JFC2410-0500TS, Supplier 1=LCSC, Supplier 2=LCSC, Supplier Part Number 2=C136377, VAC="250 V", VDC="250 V"
J1 J2 J3 J4 J5 J6 J7 J8: "4 Position FFC, FPC Connector Contacts, Bottom 0.039\" (1.00mm) Surface Mount, Right Angle", Manufacturer=Molex, Supplier Part Number 1=WM20760CT-ND, ComponentLink1Description=Specifications, ComponentLink1URL=https://tools.molex.com/pdm_docs/ps/2005280000.pdf, ComponentLink2Description="Product Page", ComponentLink2URL=https://www.molex.com/en-us/products/part-detail/2005280040, ComponentLink3Description=Drawing, ComponentLink3URL=https://www.molex.com/content/dam/molex/molex-dot-com/products/automated/en-us/salesdrawingpdf/200/200528/2005280040_sd.pdf, Manufacturer Part Number=2005280040, Supplier 1=DigiKey, Supplier 2=LCSC, Supplier 3=Mouser, Supplier Part Number 2=C563728, Supplier Part Number 3=538-200528-0040
J9A J9B: "Rectangular Power Connector, 2 Contact(s), Male, Solder Terminal, Receptacle", Manufacturer=Molex, Supplier Part Number 1=WM1875-ND, ComponentLink1Description="Product page", ComponentLink1URL=https://www.molex.com/en-us/products/part-detail/436500204, ComponentLink2Description=Drawing, ComponentLink2URL=https://www.molex.com/content/dam/molex/molex-dot-com/products/automated/en-us/salesdrawingpdf/436/43650/436500204_sd.pdf, Manufacturer Part Number=43650-0204, Supplier 1=DigiKey, Supplier 2=LCSC, Supplier 3=Mouser, Supplier Part Number 2=C587652, Supplier Part Number 3=538-43650-0204
Q1: "Small Signal Bipolar Transistor, 2A I(C), 100V V(BR)CEO, 1-Element, NPN, Silicon, TO-261AA", Current="2 A", Manufacturer="ON Semiconductor", Supplier Part Number 1=NSV1C201MZ4T1GOSCT-ND, Voltage="100 V", ComponentLink1Description=Datasheet, ComponentLink1URL=https://www.onsemi.com/pdf/datasheet/nss1c201mz4-d.pdf, Manufacturer Part Number=NSV1C201MZ4T1G, Polarity=NPN, Supplier 1=DigiKey, Supplier 2=LCSC, Supplier 3=Mouser, Supplier Part Number 2=C86644, Supplier Part Number 3=863-NSV1C201MZ4T1G
R1 R5 R9 R13 R17 R21 R25 R29 R33 R45 R49 R53 R57 R61 R63 R64 R65 R67 R69 R73 R77: Manufacturer=YAGEO, Package=0402, Power Rating (mW)=62.5, Temperature Coefficient=Â±100ppm/â„ƒ, Tolerance=1%, ComponentLink1Description=Datasheet, Supplier 2=LCSC
  R1 R5 R9 R13 R17 R21 R25 R29 R33 R45 R49 R53 R57 R61 R63 R64 R65 R69 R73 R77: ComponentLink1URL=https://wmsc.lcsc.com/wmsc/upload/file/pdf/v2/lcsc/2304140030_YAGEO-RC0402FR-07100RL_C106232.pdf, Manufacturer Part Number=RC0402FR-07100RL, Supplier Part Number 2=C106232
  R67: ComponentLink1URL=https://wmsc.lcsc.com/wmsc/upload/file/pdf/v2/lcsc/2304140030_YAGEO-RC0402FR-0730RL_C138007.pdf, Manufacturer Part Number=RC0402FR-0730RL, Supplier Part Number 2=C138007
R2 R6 R10 R14 R18 R22 R26 R30 R34 R35 R36 R37 R38 R40 R41 R42 R43 R46 R50 R54 R58 R62 R70 R74 R80A R80B R82A R82B: Manufacturer="UNI-ROYAL(Uniroyal Elec)", Package=0402, Power Rating (mW)=62.5, Temperature Coefficient=Â±100ppm/â„ƒ, Tolerance=1%, ComponentLink1Description=Datasheet, Supplier 2=LCSC
  R2 R6 R10 R14 R18 R22 R26 R30 R34 R46 R50 R54 R58 R62 R70 R74: ComponentLink1URL=https://wmsc.lcsc.com/wmsc/upload/file/pdf/v2/lcsc/2206010216_UNI-ROYAL-Uniroyal-Elec-0402WGF1001TCE_C11702.pdf, Manufacturer Part Number=0402WGF1001TCE, Supplier Part Number 2=C11702
  R35 R36 R37 R38 R40 R41 R42 R43: ComponentLink1URL=https://wmsc.lcsc.com/wmsc/upload/file/pdf/v2/lcsc/2206010100_UNI-ROYAL-Uniroyal-Elec-0402WGF1002TCE_C25744.pdf, Manufacturer Part Number=0402WGF1002TCE, Supplier Part Number 2=C25744
  R80A R80B R82A R82B: ComponentLink1URL=https://wmsc.lcsc.com/wmsc/upload/file/pdf/v2/lcsc/2205311900_UNI-ROYAL-Uniroyal-Elec-0402WGF499JTCE_C25120.pdf, Manufacturer Part Number=0402WGF499JTCE, Supplier Part Number 2=C25120
R3 R4 R7 R8 R11 R12 R15 R16 R19 R20 R23 R24 R27 R28 R31 R32 R39 R44 R47 R48 R51 R52 R55 R56 R59 R60 R66 R68 R71 R72 R75 R76 R78 R79: Manufacturer=YAGEO, Package=2512, Power Rating (mW)=1000, Temperature Coefficient=Â±100ppm/â„ƒ, Tolerance=1%, ComponentLink1Description=Datasheet, ComponentLink1URL=https://wmsc.lcsc.com/wmsc/upload/file/pdf/v2/lcsc/2304140030_YAGEO-RC2512FK-0730RL_C309607.pdf, Manufacturer Part Number=RC2512FK-0730RL, Supplier 2=LCSC, Supplier Part Number 2=C309607
R81A R81B: Manufacturer="UNI-ROYAL(Uniroyal Elec)", Package=0603, Power Rating (mW)=200, Temperature Coefficient=Â±100ppm/â„ƒ, Tolerance=1%, ComponentLink1Description=Datasheet, ComponentLink1URL=https://wmsc.lcsc.com/wmsc/upload/file/pdf/v2/lcsc/2304140030_UNI-ROYAL-Uniroyal-Elec-HP03W5F1001T5E_C2759450.pdf, Manufacturer Part Number=HP03W5F1001T5E, Supplier 2=LCSC, Supplier Part Number 2=C2759450
T1A T1B: "200ÂµH LAN Pulse Transformer 1CT:1CT Surface Mount", Manufacturer="Bourns Inc.", Supplier Part Number 1=118-SM91502ALA-ECT-ND, ComponentLink1Description=Datasheet, ComponentLink1URL=https://www.bourns.com/docs/product-datasheets/sm91502ala.pdf, Manufacturer Part Number=SM91502ALA-E, Supplier 1=DigiKey, Supplier 2=LCSC, Supplier 3=Mouser, Supplier Part Number 2=C5337144, Supplier Part Number 3=652-SM91502ALA-E
U1: "IC MONITOR BATT STACK", Manufacturer="Texas Instruments", Supplier Part Number 1=296-BQ79616PAPRQ1CT-ND, ComponentLink1Description=Datasheet, ComponentLink1URL=https://www.ti.com/lit/ds/symlink/bq79616-q1.pdf, Manufacturer Part Number=BQ79616PAPRQ1, Supplier 1=DigiKey, Supplier 2=LCSC, Supplier 3=Mouser, Supplier Part Number 2=C3682338, Supplier Part Number 3=595-BQ79616PAPRQ1
MH1 MH2 MH3 MH4 MH5 MH6 MH7 MH8 MH9 MH10 MH11 MH12 MH13 MH14 MH15 MH16 MH17 MH18 MH19 MH20 MH21 MH22 MH23 MH24 MH25 MH26 MH27 MH28 MH29 MH30 MH31 MH32: Manufacturer Part Number=HOLE_M2

## Via types
v1: diameter 0.6, hole 0.3, L1 to L4, 192 vias

## Nets (pads, with @x,y where several pads share a name; then routed paths per layer and width w, separated by ;. In a path a pad name is that pad's centre, name@x,y a point inside that pad or via, vN(x,y) a via of type N, cw(c..) or ccw(c..) an arc to the next point about the centre after c; other vN are vias at no path point)
AVDD: C40.1 U1.38 | length 2.5
  L1 w0.218: U1.38@255.75,102.7 255.75,103.75 256.1,104.1 C40.1@256.1,105.05
BAT: C29.2 C32.1 R67.2 U1.1 | length 31.8
  L1 w0.3: R67.2@226.7,103.05 C29.2@233.4,103.05 234.8,103.05 235.65,103.05 236.4,102.3 237.9,102.3 242.3,97.9 242.3,92.9 243.9,91.3 U1.1@250.75,91.3
CB0: C38.2 C44.1 R78.1 R79.2 U1.34 | length 186.9
  L1 w0.3: U1.34@257.75,102.7 257.75,103.65 258,103.9 258.6,103.9 258.95,103.55 C44.1@261.2,103.55 262.1,103.55 263.5,104.95 C38.2@265.9,104.95 267.35,104.95 268.2,104.1 v1(442.5,104.1)
CB1: C35.2 C38.1 D16.2 R75.1 R76.2 U1.32 | length 198.6
  L1 w0.3: U1.32@260.2,100.75 261.1,100.75 263.8,103.45 C35.2@264.4,103.45 C38.1@265.9,103.45 266.75,103.45 267.6,102.6 274.2,102.6 274.5,102.9 v1(441,102.9) ; D16.2@469.3,78.25 v1(469.3,85.5)
  L3 w0.3: v1(441,93.9) v1(441,102.9)
CB2: C30.2 C35.1 D15.2 R71.1 R72.2 U1.30 | length 208.9
  L1 w0.3: U1.30@260.2,99.75 261.6,99.75 263.8,101.95 C35.1@264.4,101.95 C30.2@265.8,101.95 266.916,101.95 267.766,101.1 274.5,101.1 275.1,101.7 v1(410.1,101.7) 442.6,101.7 446.3,98 D15.2@446.3,78.25
CB3: C27.2 C30.1 D14.2 R66.1 R68.2 U1.28 | length 150.2
  L1 w0.3: U1.28@260.2,98.75 262.1,98.75 263.7,100.35 C27.2@264.4,100.35 265.7,100.35 C30.1@265.8,100.45 266.912,100.45 267.762,99.6 274.8,99.6 275.7,100.5 v1(395.1,100.5) ; D14.2@423.3,78.25 v1(423.3,85.5)
  L3 w0.3: v1(395.1,93.9) v1(395.1,100.5)
CB4: C25.2 C27.1 D13.2 R59.1 R60.2 U1.26 | length 168.5
  L1 w0.3: U1.26@260.2,97.75 262.6,97.75 263.7,98.85 C27.1@264.4,98.85 C25.2@265.8,98.85 266.15,98.5 267.216,98.5 267.616,98.1 275.1,98.1 276.3,99.3 362.7,99.3 363.3,98.7 v1(363.9,98.7) 364.5,98.7 365.1,99.3 398.1,99.3 400.3,97.1 D13.2@400.3,78.25
  L3 w0.3: v1(363.9,98.7) v1(363.9,105.6)
CB5: C23.2 C25.1 D12.2 R55.1 R56.2 U1.24 | length 101.3
  L1 w0.3: U1.24@260.2,96.75 263,96.75 263.6,97.35 C23.2@264.4,97.35 C25.1@265.8,97.35 266.984,97.35 267.734,96.6 275.4,96.6 276.9,98.1 v1(348.9,98.1) ; D12.2@377.3,78.25 v1(377.3,85.5)
  L3 w0.3: v1(348.9,93.9) v1(348.9,98.1)
CB6: C21.2 C23.1 D11.2 R51.1 R52.2 U1.22 | length 120.5
  L1 w0.3: U1.22@260.2,95.75 264.3,95.75 C23.1@264.4,95.85 C21.2@265.8,95.85 266.896,95.85 267.646,95.1 275.7,95.1 277.5,96.9 v1(318,96.9) 351.3,96.9 354.3,93.9 D11.2@354.3,78.25
  L3 w0.3: v1(318,96.9) v1(318,105.3)
CB7: C19.2 C21.1 D10.2 R47.1 R48.2 U1.20 | length 52.9
  L1 w0.3: U1.20@260.2,94.75 262.9,94.75 263.3,94.35 C19.2@264.4,94.35 C21.1@265.8,94.35 266.93,94.35 267.68,93.6 276,93.6 278.1,95.7 v1(303,95.7) ; D10.2@331.3,78.25 v1(331.3,85.5)
  L3 w0.3: v1(303,94.2) v1(303,95.7)
CB8: C16.2 C19.1 D9.2 R39.1 R44.2 U1.18 | length 76.8
  L1 w0.3: U1.18@260.2,93.75 262.05,93.75 262.95,92.85 C19.1@264.4,92.85 C16.2@265.8,92.85 266.964,92.85 267.714,92.1 v1(276.3,92.1) 276.9,92.1 277.8,93 307.2,93 308.3,91.9 D9.2@308.3,78.25
  L3 w0.3: v1(276.3,92.1) v1(276.3,105.6)
CB9: C14.2 C16.1 D8.2 R31.1 R32.2 U1.16 | length 46.4
  L1 w0.3: C14.2@234.8,91.05 235.594,91.05 242.144,84.5 253.557,84.5 258.25,89.193 U1.16@258.25,91.3 265.75,91.3 C16.1@265.8,91.35 266.55,91.35 v1(267,90.9) ; D8.2@285.3,78.25 v1(285.3,85.5)
CB10: C12.2 C14.1 D7.2 R27.1 R28.2 U1.14 | length 108
  L1 w0.2: v1(224.4,92.7) 223.8,92.7 223.2,92.1 223.2,90.3 225,88.5 235.2,88.5 237,86.7 237,78 238.2,76.8 244.2,76.8 245.65,78.25 D7.2@262.3,78.25
  L1 w0.3: v1(224.4,92.7) 225,92.7 225.15,92.55 C12.2@233.4,92.55 C14.1@234.8,92.55 235.95,92.55 237.05,91.45 237.05,90.725 242.475,85.3 253.225,85.3 257.25,89.325 U1.14@257.25,91.3
  L3 w0.3: v1(224.4,92.7) 224.4,105 v1(225.9,106.5)
CB11: C10.2 C12.1 D6.2 R23.1 R24.2 U1.12 | length 39
  L1 w0.3: v1(231.9,94.2) 232.05,94.05 C12.1@233.4,94.05 C10.2@234.8,94.05 236.25,94.05 237.85,92.45 237.85,91.057 242.807,86.1 252.894,86.1 256.25,89.456 U1.12@256.25,91.3 ; D6.2@239.3,78.25 v1(239.3,85.5)
CB12: C8.2 C10.1 D5.2 R19.1 R20.2 U1.10 | length 75.3
  L1 w0.2: D5.2@216.3,78.25 216.3,90.3 v1(222,96)
  L1 w0.3: v1(222,96) 222.45,95.55 C8.2@233.4,95.55 C10.1@234.8,95.55 236.55,95.55 238.65,93.45 238.65,91.388 243.138,86.9 252.563,86.9 255.25,89.587 U1.10@255.25,91.3
  L3 w0.3: v1(222,96) v1(222,110.1)
CB13: C6.2 C8.1 D4.2 R15.1 R16.2 U1.8 | length 66.4
  L1 w0.3: D4.2@193.3,78.25 v1(193.3,85.5) ; v1(208.5,98.7) 221.4,98.7 223.05,97.05 C8.1@233.4,97.05 C6.2@234.8,97.05 236.85,97.05 239.45,94.45 239.45,91.719 243.469,87.7 252.231,87.7 254.25,89.719 U1.8@254.25,91.3
  L3 w0.3: v1(208.5,93.9) v1(208.5,98.7)
CB14: C4.2 C6.1 D3.2 R11.1 R12.2 U1.6 | length 109
  L1 w0.2: D3.2@170.3,78.25 170.3,92.6 v1(177.6,99.9)
  L1 w0.3: v1(177.6,99.9) 222,99.9 223.35,98.55 C4.2@233.4,98.55 C6.1@234.8,98.55 237.15,98.55 240.25,95.45 240.25,92.051 243.801,88.5 251.9,88.5 253.25,89.85 U1.6@253.25,91.3
CB15: C2.2 C4.1 D2.2 R7.1 R8.2 U1.4 | length 113.5
  L1 w0.3: D2.2@147.3,78.25 v1(147.3,85.5) ; v1(162,101.1) 222.6,101.1 223.65,100.05 C4.1@233.4,100.05 ; C4.1@233.4,100 234.75,100 C2.2@234.8,100.05 237.45,100.05 241.05,96.45 241.05,92.382 244.132,89.3 251.466,89.3 252.25,90.084 U1.4@252.25,91.3
  L3 w0.3: v1(162,93.9) v1(162,101.1)
CB16: C2.1 C29.1 D1.2 R3.1 R4.2 U1.2 | length 159.3
  L1 w0.2: D1.2@124.3,78.25 124.3,82 131.1,88.8 143.7,88.8 v1(147,92.1)
  L1 w0.3: v1(142.2,102.3) v1(147,102.3) 231.6,102.3 232.35,101.55 C29.1@233.4,101.55 234.75,101.55 C2.1@234.8,101.6 ; C2.1@234.8,101.55 237.75,101.55 241.85,97.45 241.85,92.714 244.464,90.1 251,90.1 251.25,90.35 U1.2@251.25,91.3
  L3 w0.2: v1(147,92.1) v1(147,102.3)
  L4 w1: v1(142.2,102.3) 142.2,102.8
CELL0: F18.1 F19.1 MH32.1
CELL1: F17.1 MH30.1 MH31.1
CELL2: F16.1 MH28.1 MH29.1
CELL3: F15.1 MH26.1 MH27.1
CELL4: F14.1 MH24.1 MH25.1
CELL5: F13.1 MH22.1 MH23.1
CELL6: F12.1 MH20.1 MH21.1
CELL7: F11.1 MH18.1 MH19.1
CELL8: F10.1 MH16.1 MH17.1
CELL9: F9.1 MH14.1 MH15.1
CELL10: F8.1 MH12.1 MH13.1
CELL11: F7.1 MH10.1 MH11.1
CELL12: F6.1 MH8.1 MH9.1
CELL13: F5.1 MH6.1 MH7.1
CELL14: F4.1 MH4.1 MH5.1
CELL15: F3.1 MH2.1 MH3.1
CELL16: F1.1 F2.1 MH1.1
COMH._N: C49B.1 R81B.1 R82B.1 U1.42 | length 120.3
  L1 w0.218: U1.42@253.75,102.7 253.709,102.741 253.709,104.709 254.218,105.218 254.218,107.4 254.318,107.5 v1(254.384,107.5)
  L4 w0.218: R82B.1@149.1,96 149.35,96.25 R81B.1@150.6,96.25 150.85,96.5 C49B.1@152.6,96.5 152.891,96.791 243.3,96.791 243.791,96.3 251.191,96.3 252.618,97.727 252.618,104.627 254.218,106.227 254.218,107.334 v1(254.384,107.5)